# Altium PCB Adapter.PcbDoc
Units mm, origin at the board's own origin, x right, y up, seen from the top; angles counter-clockwise.
Board outline 52 x 50.6 mm, 2 copper layers (Top Layer, Bottom Layer); 2 components, 14 nets, 52 pads, 0 vias.
Unrouted connection lines stored in the file: 1.
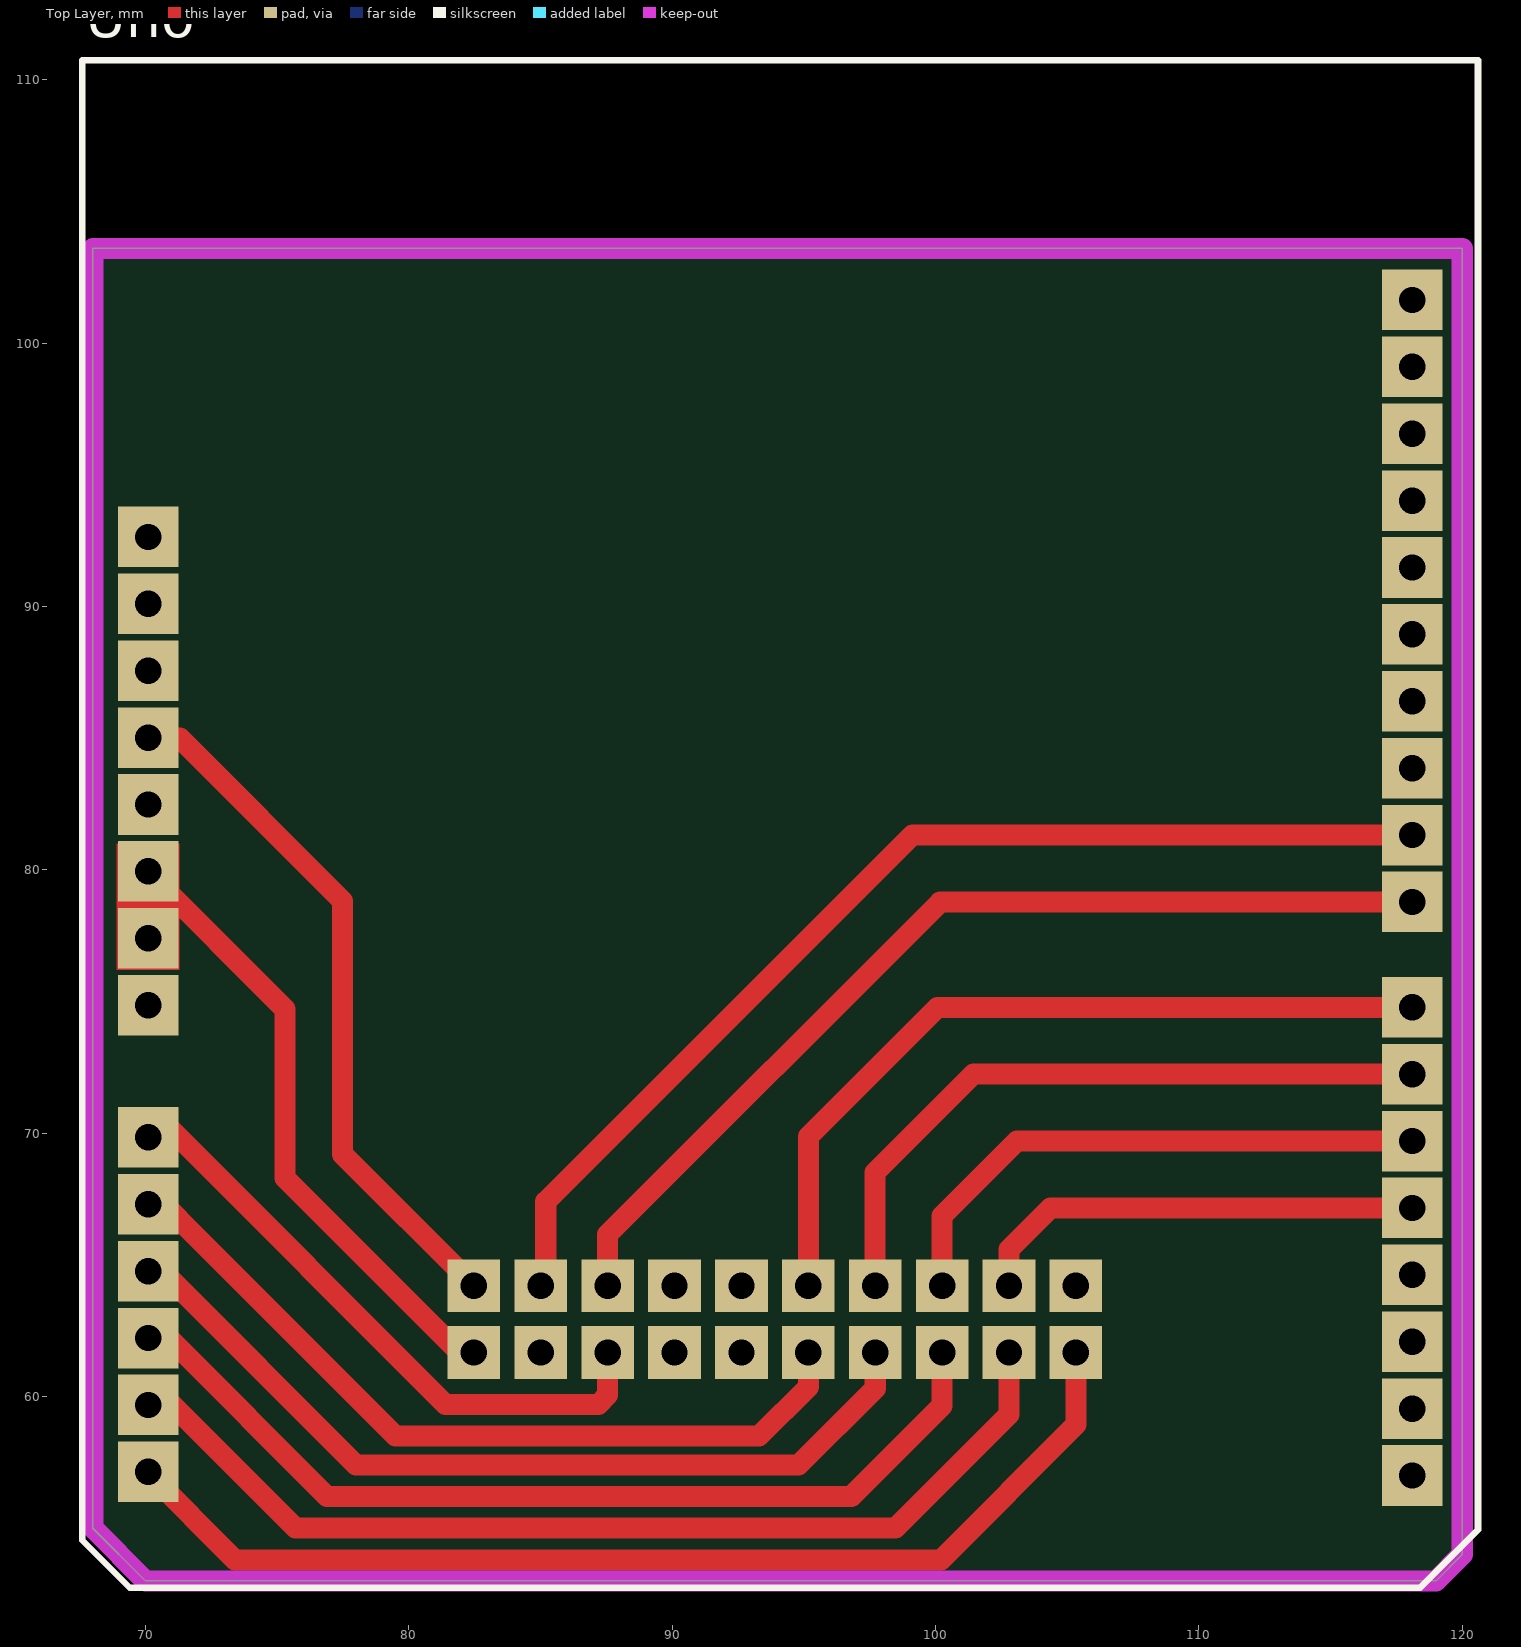
[diagram p0: Top Layer view]
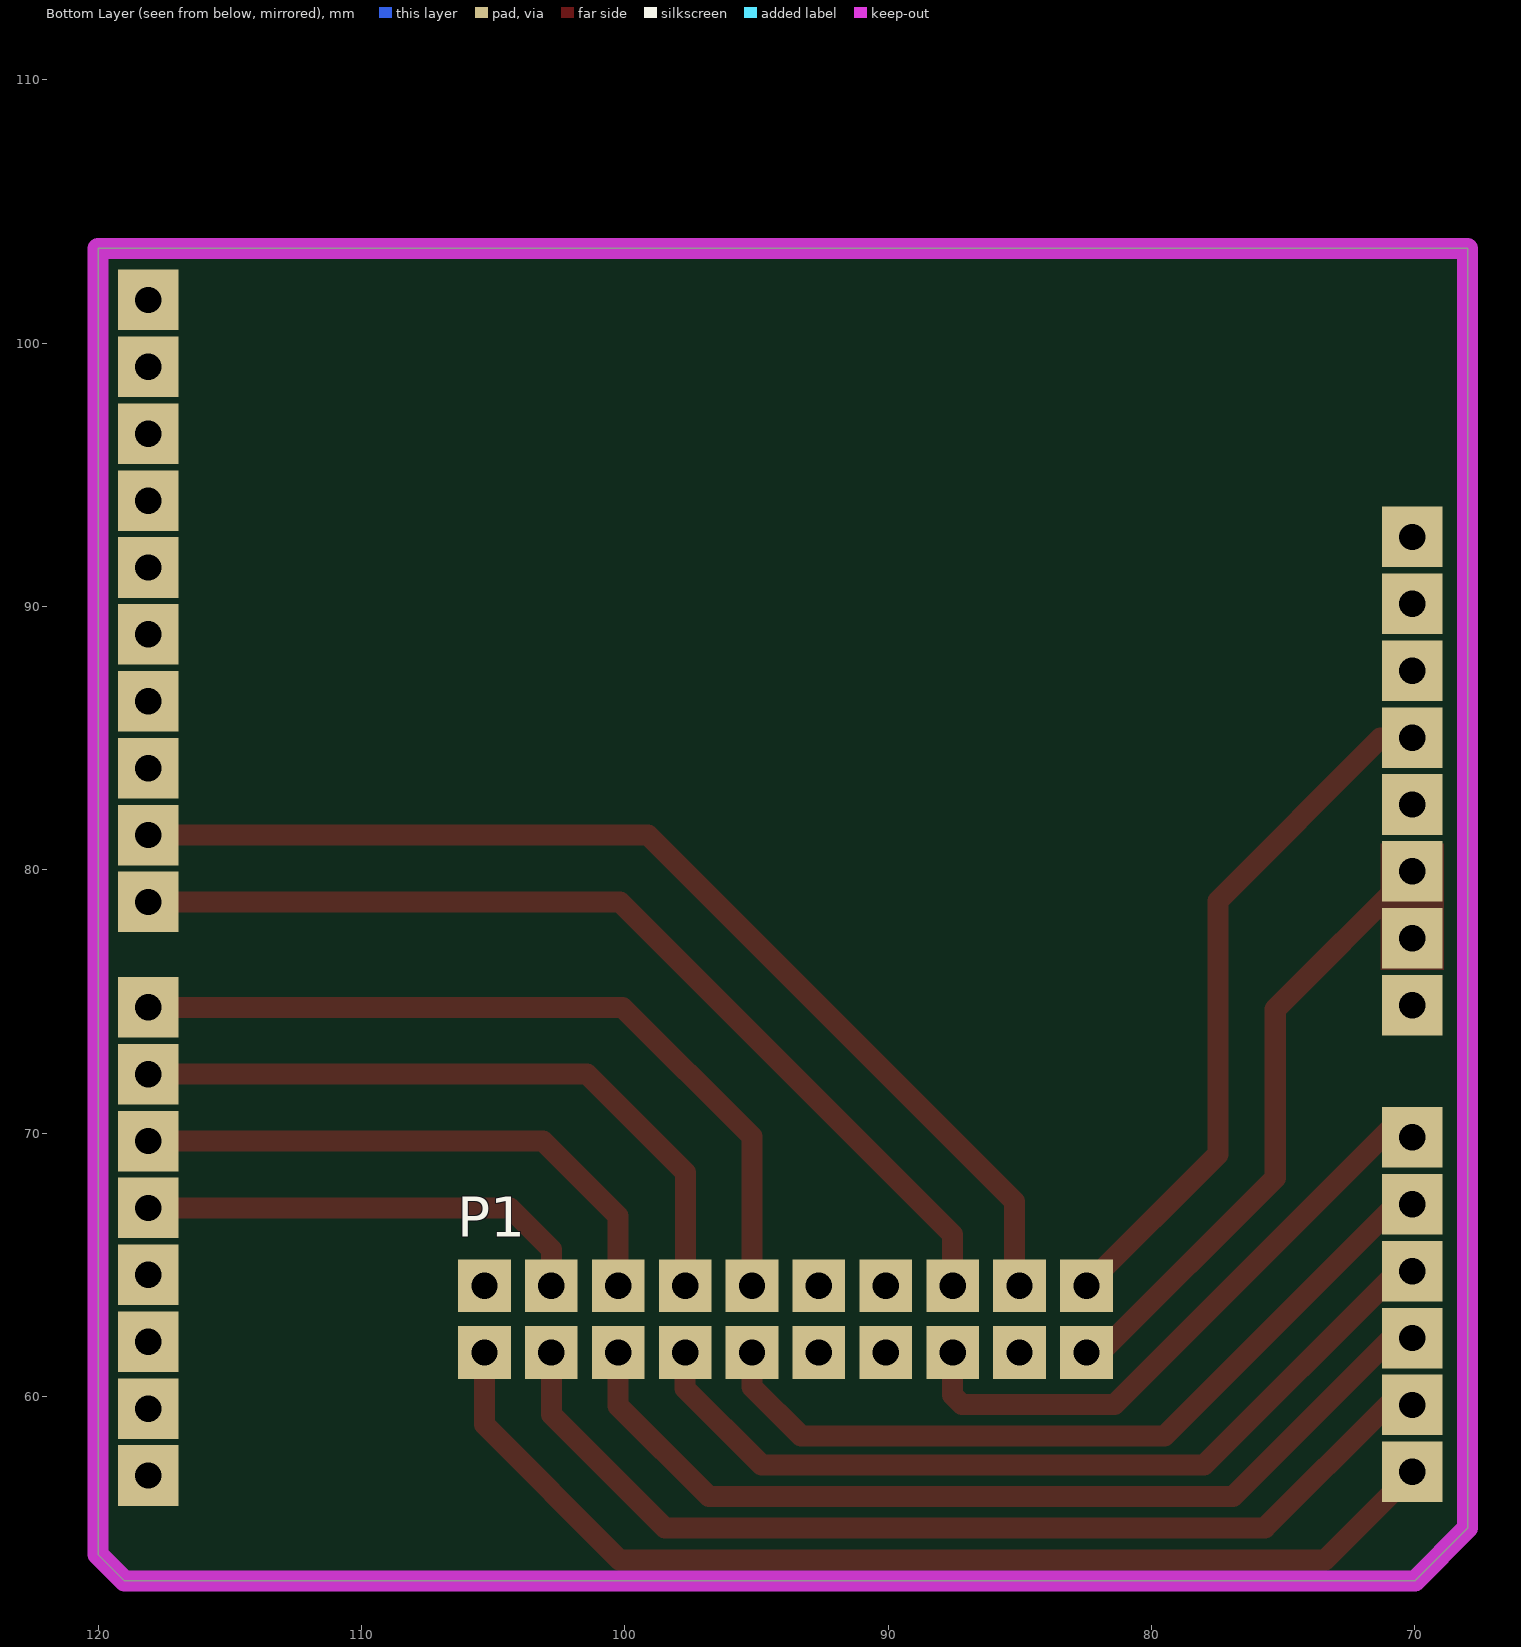
[diagram p1: Bottom Layer view, seen from below]

## Layer stack, top to bottom
Top Solder: solder mask 0.0102, Solder Resist, Dk 3.5
Top Layer: signal copper 0.0356
Dielectric 1: dielectric 0.32, FR-4, Dk 4.8
Bottom Layer: signal copper 0.0356
Bottom Solder: solder mask 0.0102, Solder Resist, Dk 3.5

## Board outline
68,55 70,53 119,53 120,54 120,103.6 68,103.6

## Design rules (kind name [scope] priority, off if disabled: settings)
Clearance [All] p1: gap=0.2
ComponentClearance [All] p1 off: gap=0.2 collisioncheckmode=3 verticalgap=0.2 showdistances=FALSE
PolygonConnect [All] p1: connectstyle=Relief reliefconductorwidth=0.254 reliefentries=4 polygonreliefangle="90 Angle" airgapwidth=0.254
RoutingVias [All] p1: holewidth=0.711 width=1.27 viastyle="Through Hole" minholewidth=0.711 minwidth=1.27 maxholewidth=0.711 maxwidth=1.27
SolderMaskExpansion [All] p1: expansion=0.102
Width [All] p1: maxlimit=10 minlimit=0.1 preferedwidth=0.254
29 further rules are at their usual default settings.

## Components (designator, comment, footprint, x,y, rotation, side; value= is the part's Value field where it differs from the comment)
P1 "Atmel OLED1-XPRO" "Header 2x10 male leftangle" 93.9,60.4 r90 bottom
Uno "Arduino Uno Shield" "Arduino Uno Shield" 94.1,83.1 r270 top

## Footprints (in the part's own frame and the unit in brackets; to place one, negate y for a bottom-side part, rotate by r counter-clockwise, add the part's x,y. Pads: shape width x height; smd on the part's side, far side on the other; paste and mask are expansions set on the pad)
"Arduino Uno Shield" [mm]
  rect 2.3x2.3 hole 1: 0(26.1,24) 1(23.56,24) 2(21.02,24) 3(18.48,24) 3V3(-1.92,-24) 4(15.94,24) 5(13.4,24) 5V(0.62,-24) 6(10.86,24) 7(8.32,24) 8(4.32,24) 9(1.78,24) 10(-0.76,24) 11(-3.3,24) 12(-5.84,24) 13(-8.38,24) A0(13.26,-24) A1(15.8,-24) A2(18.34,-24) A3(20.88,-24) A4(23.42,-24) A5(25.96,-24) AREF(-13.46,24) GND1(3.16,-24) GND2(5.7,-24) GND3(-10.92,24) IOREF(-7,-24) NC(-9.54,-24) RESET(-4.46,-24) SCL(-18.54,24) SDA(-16,24) Vin(8.24,-24)
  silkscreen extent -27.64,-26.5 30.36,26.5
"Header 2x10 male leftangle" [mm]
  rect 2x2 hole 1: 1(1.27,11.43) 2(3.81,11.43) 3(1.27,8.89) 4(3.81,8.89) 5(1.27,6.35) 6(3.81,6.35) 7(1.27,3.81) 8(3.81,3.81) 9(1.27,1.27) 10(3.81,1.27) 11(1.27,-1.27) 12(3.81,-1.27) 13(1.27,-3.81) 14(3.81,-3.81) 15(1.27,-6.35) 16(3.81,-6.35) 17(1.27,-8.89) 18(3.81,-8.89) 19(1.27,-11.43) 20(3.81,-11.43)
  body extent -8.89,-12.7 4.16,12.7, height 2.9

## Part data
Uno: library part "Arduino Uno"

## Nets (pads, with @x,y where several pads share a name; then routed paths per layer and width w, separated by ;. In a path a pad name is that pad's centre, name@x,y a point inside that pad or via, vN(x,y) a via of type N, cw(c..) or ccw(c..) an arc to the next point about the centre after c; other vN are vias at no path point)
3V3: P1.20 Uno.3V3 | length 25.4
  Top Layer w0.8: 71.3,85 77.48,78.82 77.48,69.2 P1.20
BUTTON1: P1.9 Uno.A1 | length 30.4
  Top Layer w0.8: Uno.A1@70.442,67.258 70.751,67.258 71.85,66.159 71.85,66.15 79.5,58.5 93.3,58.5 95.17,60.37 P1.9
BUTTON2: P1.3 Uno.A4 | length 37.9
  Top Layer w0.8: Uno.A4@71,59.7 75.7,55 98.48,55 102.79,59.31 P1.3
BUTTON3: P1.4 Uno.4 | length 17.3
  Top Layer w0.8: P1.4 102.79,65.59 104.36,67.16 Uno.4
DATA_CMD_SEL: P1.5 Uno.A3 | length 35.3
  Top Layer w0.8: Uno.A3@70.922,62.178 76.9,56.2 96.8,56.2 100.25,59.65 P1.5
DISPLAY_RESET: P1.10 Uno.7 | length 30.6
  Top Layer w0.8: P1.10 95.17,69.87 100.08,74.78 Uno.7
DISPLAY_SS: P1.15 Uno.A0 | length 22.7
  Top Layer w0.8: Uno.A0@70.95,70.15 81.4,59.7 87.2,59.7 87.55,60.05 P1.15
GND: P1.2 P1.19 Uno.GND1 Uno.GND2 | length 23.7
  Top Layer w0.8: Uno.GND1@70.107,79.898 75.3,74.705 75.3,68.3 81.93,61.67 P1.19
ID: P1.1 Uno.A5 | length 41.5
  Top Layer w0.8: Uno.A5@70.107,57.098 73.405,53.8 100.2,53.8 105.33,58.93 P1.1
LED1: P1.7 Uno.A2 | length 32.6
  Top Layer w0.8: Uno.A2@70.682,64.718 78,57.4 94.8,57.4 97.71,60.31 P1.7
LED2: P1.8 Uno.6 | length 26.2
  Top Layer w0.8: P1.8@97.7,64.22 97.7,68.5 101.44,72.24 Uno.6
LED3: P1.6 Uno.5 | length 21.7
  Top Layer w0.8: P1.6 100.25,66.85 103.1,69.7 Uno.5
MOSI: P1.16 Uno.8 | length 37.7
  Top Layer w0.8: P1.16 87.55,66.15 100.18,78.78 Uno.8
SCLK: P1.18 Uno.9 | length 41.7
  Top Layer w0.8: P1.18@85.2,64.4 85.2,67.4 99.12,81.32 Uno.9
pads on no net: P1.11 P1.12 P1.13 P1.14 P1.17 Uno.0 Uno.1 Uno.2 Uno.3 Uno.5V Uno.10 Uno.11 Uno.12 Uno.13 Uno.AREF Uno.GND3 Uno.IOREF Uno.NC Uno.RESET Uno.SCL Uno.SDA Uno.Vin

## Keep-outs
Keep-Out Layer:
  the board outline again, w0.8

## Other copper
Top Layer:
  rectangle net GND: 68.9,76.2 71.3,81